# Altium PCB PCB_Layout.PcbDoc
Units mm, origin at the board's own origin, x right, y up, seen from the top; angles counter-clockwise.
Board outline 100 x 50 mm, 4 copper layers (L1 (SIGNAL), L2 (GND), L3 (GND), L4 (SIGNAL)), stack 1.586 mm thick; 22 components, 14 nets, 117 pads, 43 vias.
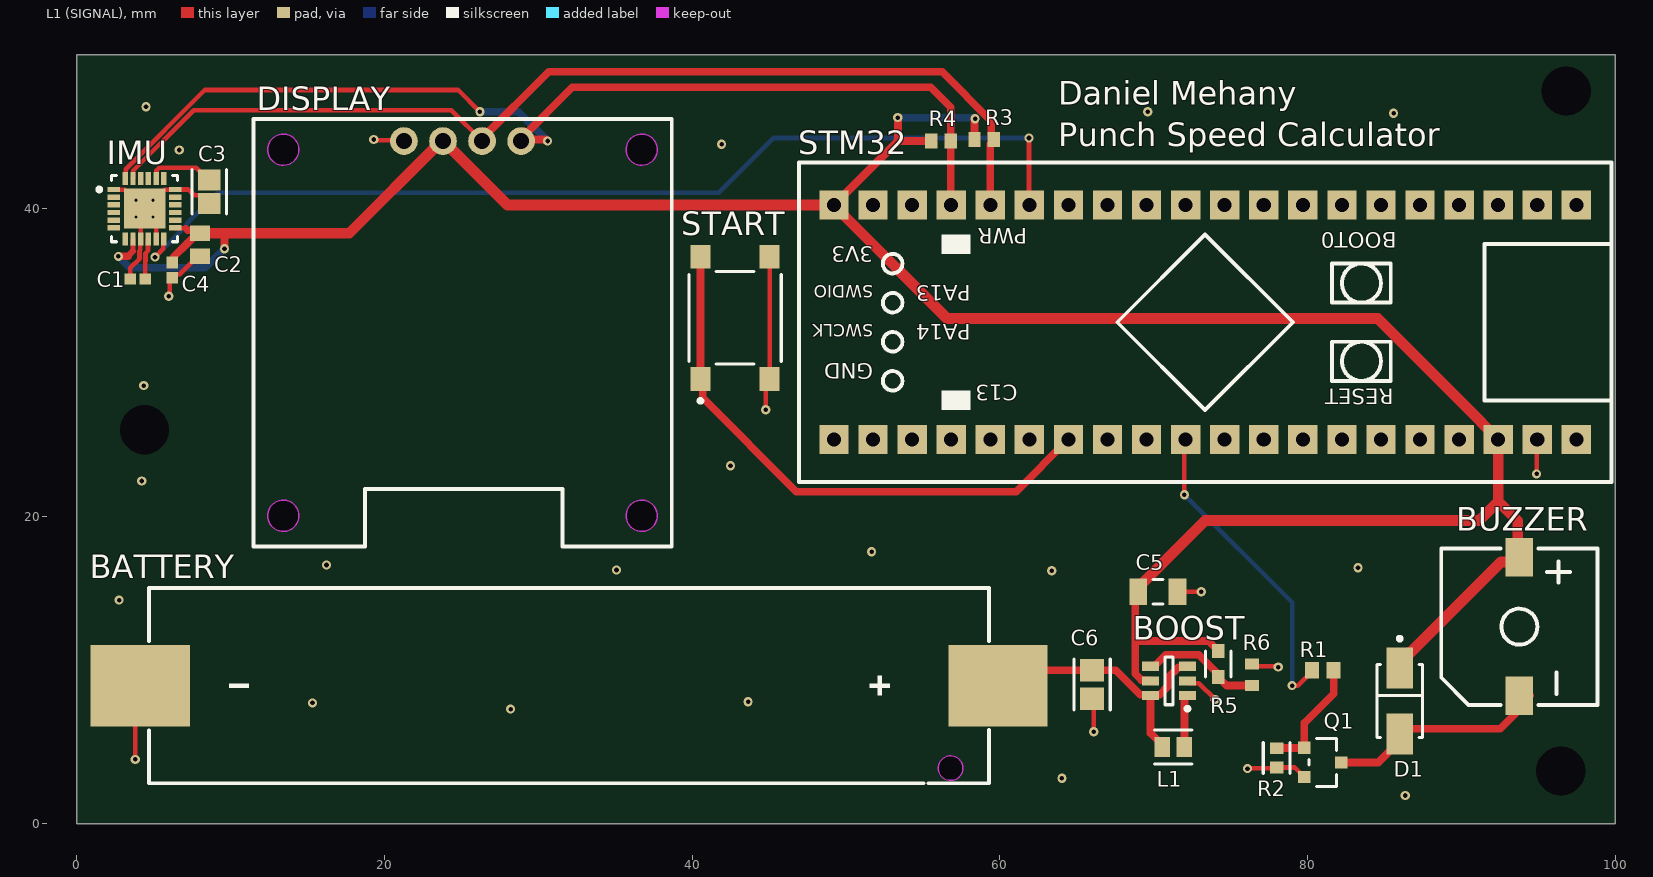
[diagram p0: L1 (SIGNAL) view]
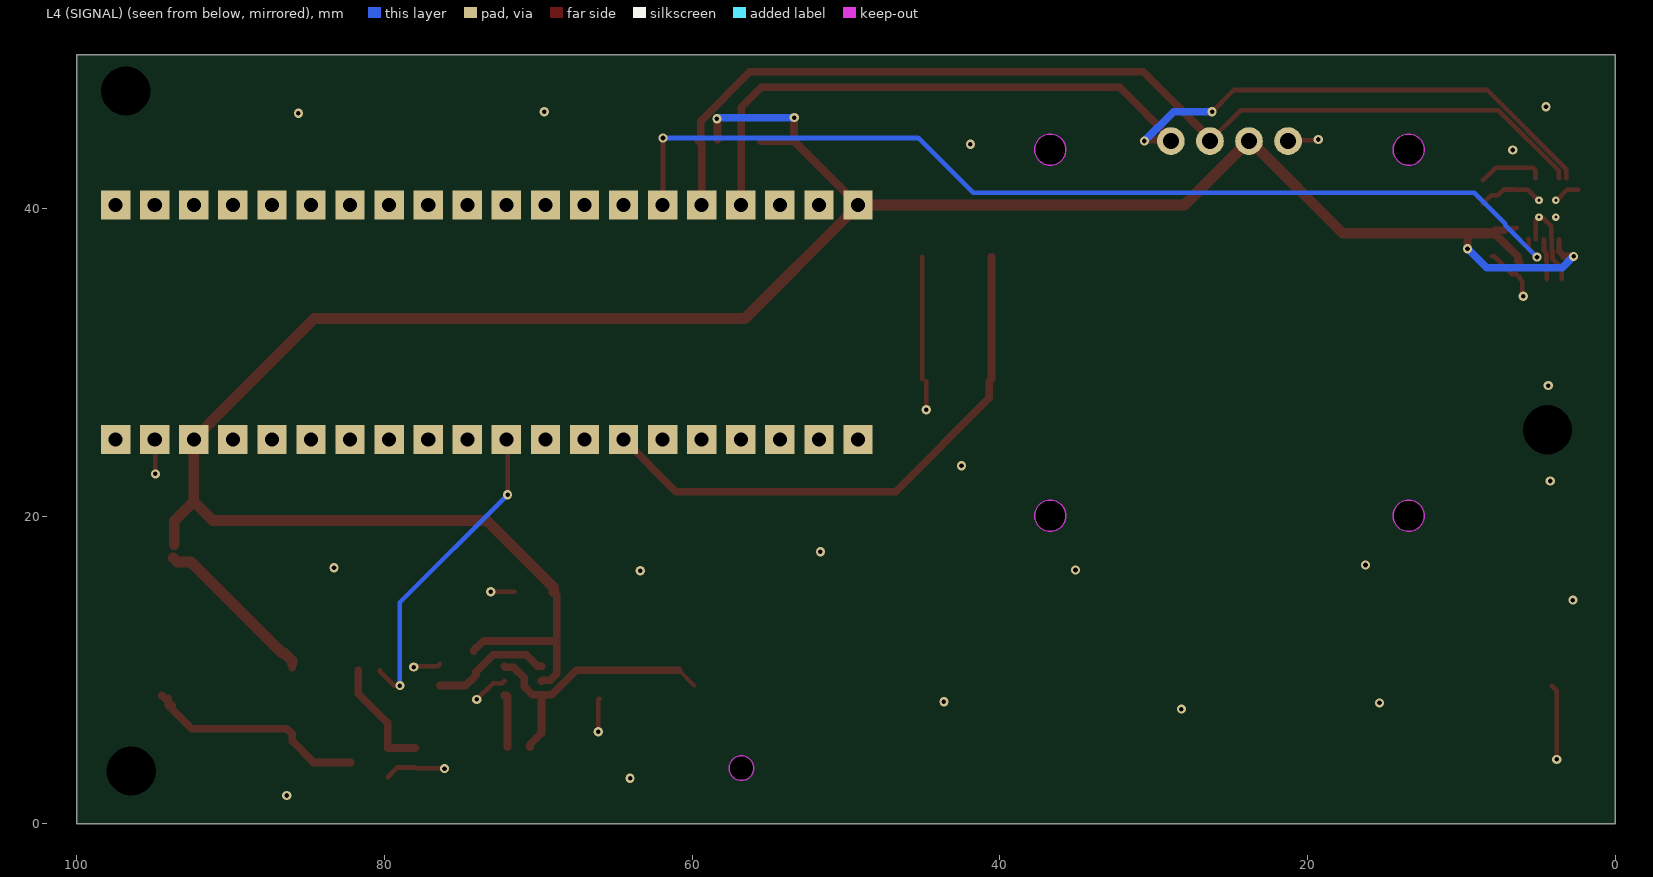
[diagram p1: L4 (SIGNAL) view, seen from below]
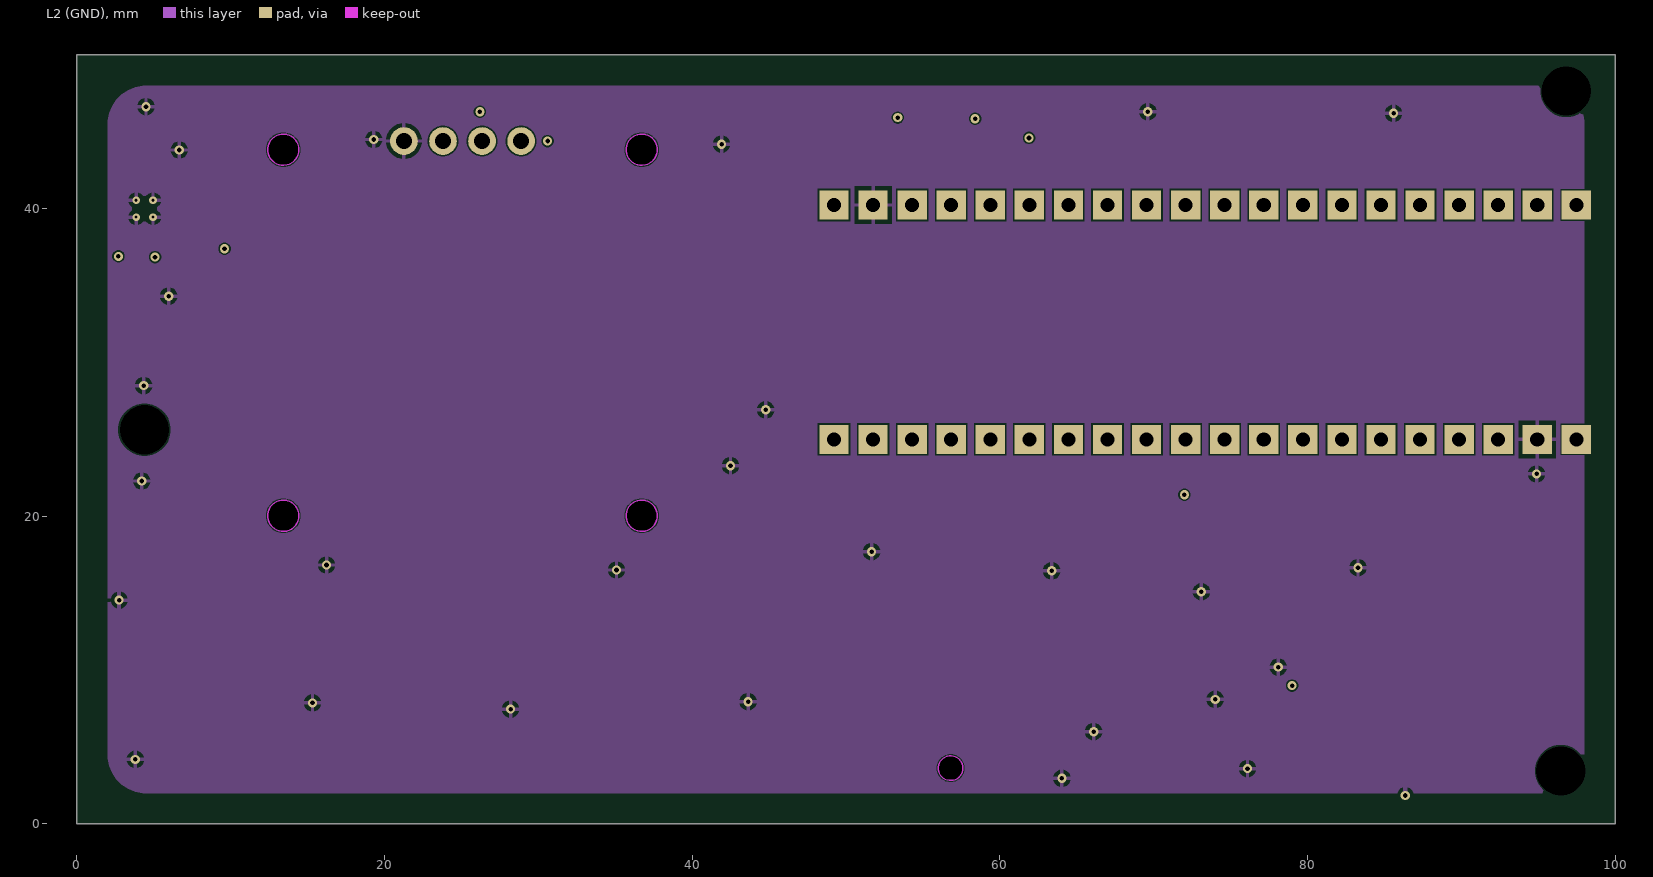
[diagram p2: L2 (GND)]
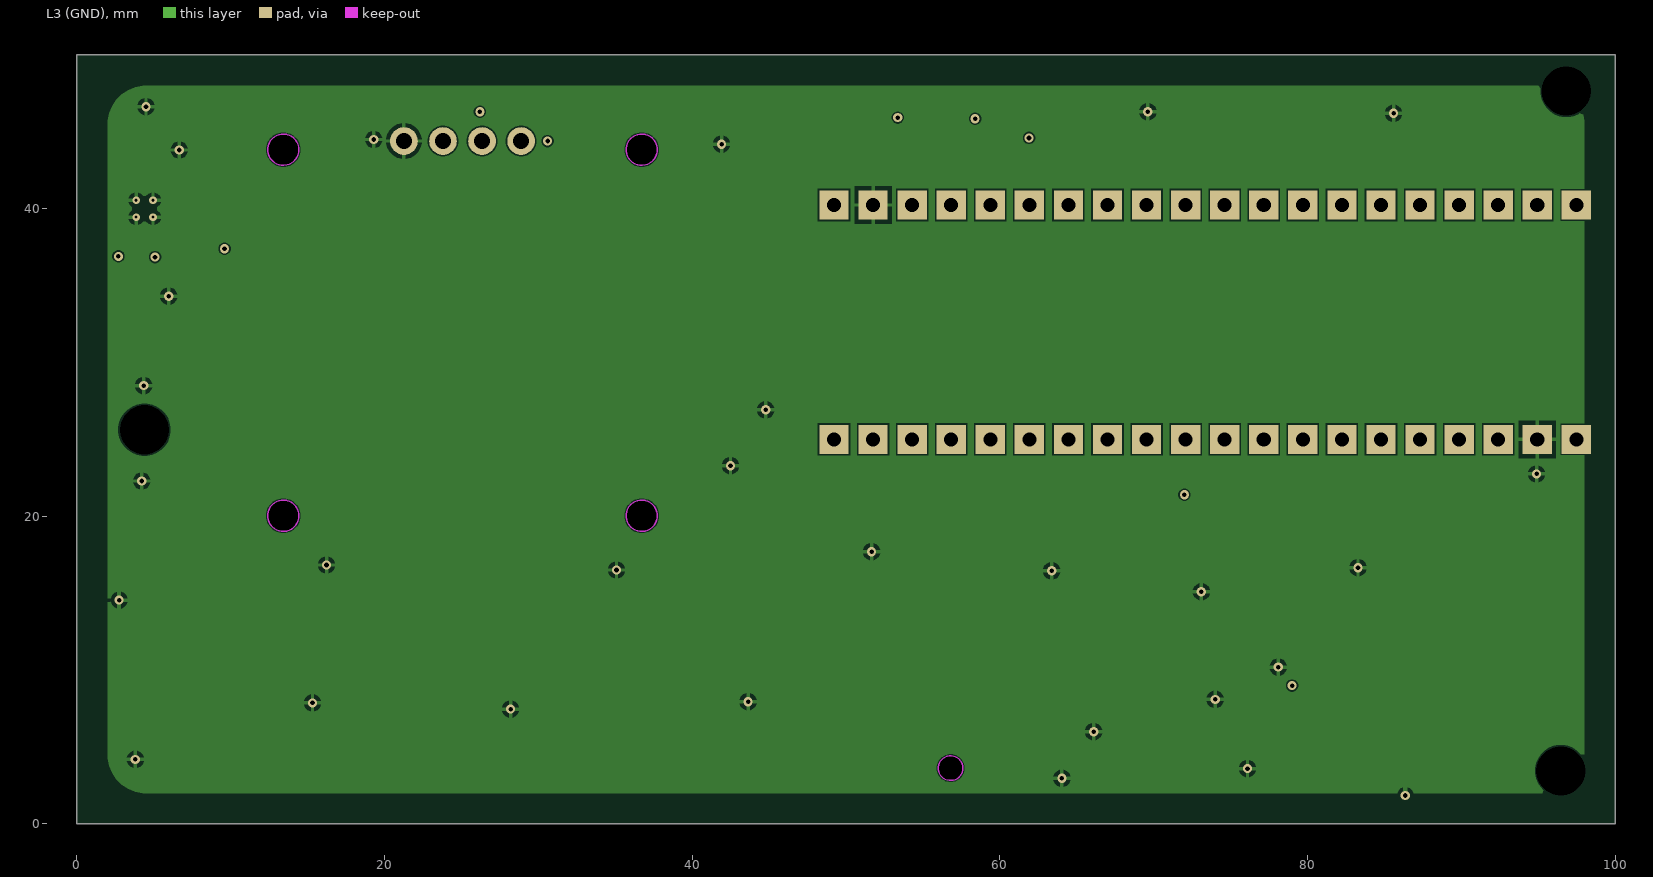
[diagram p3: L3 (GND)]
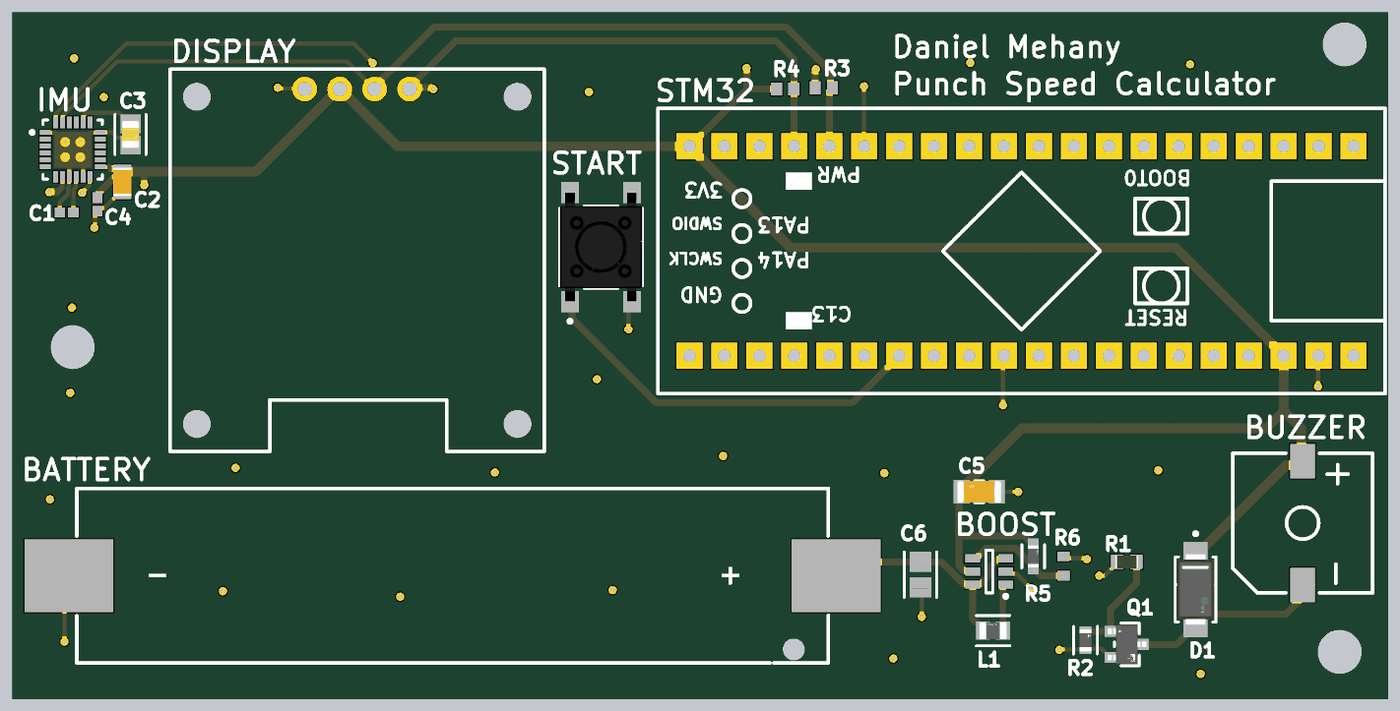
[diagram p4: 3D render of the assembled board from above, using the file's embedded part models]

## Layer stack, top to bottom
Top Solder: solder mask 0.0102, Solder Resist, Dk 3.5
L1 (SIGNAL): signal copper 0.035
Dielectric 1: prepreg 0.2104, PP-006, Dk 4.1
L2 (GND): signal copper 0.0152
Dielectric 2: dielectric 1.065, FR-4, Dk 4.8
L3 (GND): signal copper 0.0152
Dielectric 3: prepreg 0.2104, PP-006, Dk 4.1
L4 (SIGNAL): signal copper 0.035
Bottom Solder: solder mask 0.0102, Solder Resist, Dk 3.5

## Board outline
0,0 100,0 100,50 0,50

## Design rules (kind name [scope] priority, off if disabled: settings)
Clearance [All] p1: gap=0.09 ignorepadtopadclearanceinfootprint=FALSE
HoleSize [All] p1: absolutevalues=TRUE maxlimit=6 minlimit=0.3 maxpercent=80.000 minpercent=20.000
HoleToHoleClearance [All] p1: gap=0.2 allowstackedmicrovias=TRUE
MinimumSolderMaskSliver [All] p1: minsoldermaskwidth=0.1
PolygonConnect [All] p1: connectstyle=Relief reliefconductorwidth=0.254 reliefentries=4 polygonreliefangle="90 Angle" airgapwidth=0.254
RoutingVias [All] p1: holewidth=0.3 width=0.6 viastyle="Through Hole" minholewidth=0.3 minwidth=0.5 maxholewidth=1 maxwidth=3
SilkToSilkClearance [All] p1: silktosilkclearance=0.2
SilkToSolderMaskClearance [IsPad] p1: minsilkscreentomaskgap=0.1 clearancetoexposedcopper=TRUE
SolderMaskExpansion [All] p1: expansion=0.102 istentingtop=FALSE
SupplyNets "Schematic Supply Nets_1" [InNet('+3.3V')] p1: voltage=0.000
SupplyNets "Schematic Supply Nets" [InNet('GND')] p2: voltage=0.000
Width [All] p1: maxlimit=1 minlimit=0.2 preferedwidth=0.3
25 further rules are at their usual default settings.

## Components (designator, comment, footprint, x,y, rotation, side; value= is the part's Value field where it differs from the comment)
BATTERY "BH-AAA-B5BA021" BAT-SMD_BH-AAA-B5BA021 32,9 r180 top (schematic designator BP1)
BOOST "MCP1640T-I/CHY" MCHP-SOT-23-CHY6_N 71,9.3 r180 top
BUZZER "2.7kHz" BUZ-SMD_L9.6-W9.6-LS10.0-R 93.777,12.827 r90 top
C1 "CL05B104KO5NNNC" CAPC1050X55X23ML05T13 3.955,35.433 r0 top
C2 "10nF" CAPC2013X75X45LL10T25 8,37.65 r90 top
C3 "2.2nF" FP-C2012-060-0_2-IPC_B 8.6,41.1 r270 top
C4 "CL05B104KO5NNNC" CAPC1050X55X23ML05T13 6.2,36.01 r90 top
C5 "CL31A106KBHNNNE" FP-CL31-IPC_C 70.276,15.1 r0 top value=10uF
C6 "4.7uF" FP-CL21-IPC_A 66,9.074 r270 top
D1 "SS14" FP-403AE-MFG 86,8 r90 top
DISPLAY "HS96L03W2C03" OLED-TH_L27.8-W27.2-P2.54_C9900033791 25.07,44.4 r0 top (schematic designator DISP)
IMU "MPU-6050" IS-QFN-24_V 4.4,40 r0 top
L1 "4.7uH" FP-LQM21PH_G0-IPC_C 71.274,5 r180 top
Q1 "AO3400A" FP-SOT23-MFG 81,4 r0 top
R1 "100R" RESC1609X50X30ML8T20 81,10 r0 top
R2 "0603WAF1003T5E" FP-CRCW0603-HPe3-IPC_C 78,4.3 r90 top value=100kR
R3 "2.2kR" RESC1609X50X30NL10T20 58.975,44.5 r0 top
R4 "2.2kR" RESC1609X50X30NL10T20 56.175,44.4 r0 top
R5 "976kR" FP-AC0603-MFG 74.2,10.4 r90 top
R6 "562kR" RESC1608X55X25NL10T15 76.4,9.7 r270 top
START "START" FP-PTS645SM43SMTR92LFS-MFG 42.788,32.906 r90 top
STM32 "BLACK PILL V3 STM32F411" "BLACK PILL V3" 73.35,33.446 r270 top

## Footprints (in the part's own frame and the unit in brackets; to place one, negate y for a bottom-side part, rotate by r counter-clockwise, add the part's x,y. Pads: shape width x height; smd on the part's side, far side on the other; paste and mask are expansions set on the pad)
BAT-SMD_BH-AAA-B5BA021 [mm]
  rect 6.45x5.3 smd: 1(-27.875,0) 2(27.875,0)
  Keep-Out Layer board cut-out: -24,5.37 -24,5.265 -24.054,5.061 -24.16,4.879 -24.309,4.73 -24.491,4.625 -24.695,4.57 -24.905,4.57 -25.109,4.625 -25.291,4.73 -25.44,4.879 -25.545,5.061 -25.6,5.265 -25.6,5.37 -25.6,5.475 -25.545,5.679 -25.44,5.861 -25.291,6.01 -25.109,6.116 -24.905,6.17 -24.695,6.17 -24.491,6.116 -24.309,6.01 -24.16,5.861 -24.054,5.679 -24,5.475 -24,5.37 -24,5.37
  Keep-Out Layer circle w0.025: c-24.8,5.37 r0.8
  Keep-Out Layer region: -24,5.37 -24,5.265 -24.054,5.061 -24.16,4.879 -24.309,4.73 -24.491,4.625 -24.695,4.57 -24.905,4.57 -25.109,4.625 -25.291,4.73 -25.44,4.879 -25.545,5.061 -25.6,5.265 -25.6,5.37 -25.6,5.475 -25.545,5.679 -25.44,5.861 -25.291,6.01 -25.109,6.116 -24.905,6.17 -24.695,6.17 -24.491,6.116 -24.309,6.01 -24.16,5.861 -24.054,5.679 -24,5.475 -24,5.37 -24,5.37
  silkscreen extent -27.31,-6.35 27.3,6.35
"BLACK PILL V3" [mil]
  rect 75x75 hole 36 paste-99999 mask+4: 1(-267.5,950) 2(-267.5,850) 3(-267.5,750) 4(-267.5,650) 5(-267.5,550) 6(-267.5,450) 7(-267.5,350) 8(-267.5,250) 9(-267.5,150) 10(-267.5,50) 11(-267.5,-50) 12(-267.5,-150) 13(-267.5,-250) 14(-267.5,-350) 15(-267.5,-450) 16(-267.5,-550) 17(-267.5,-650) 18(-267.5,-750) 19(-267.5,-850) 20(-267.5,-950) 21(332.5,950) 22(332.5,850) 23(332.5,750) 24(332.5,650) 25(332.5,550) 26(332.5,450) 27(332.5,350) 28(332.5,250) 29(332.5,150) 30(332.5,50) 31(332.5,-50) 32(332.5,-150) 33(332.5,-250) 34(332.5,-350) 35(332.5,-450) 36(332.5,-550) 37(332.5,-650) 38(332.5,-750) 39(332.5,-850) 40(332.5,-950)
  silkscreen extent -377,-1040 442,1040
BUZ-SMD_L9.6-W9.6-LS10.0-R [mm]
  rect 2.5x1.8 smd: 1(4.5,0) 2(-4.5,0)
  silkscreen extent -5.08,-5.08 5.08,5.08
CAPC1050X55X23ML05T13 [mm] "Chip Capacitor, 2-Leads, Body 1.05x0.55mm, IPC Low Density"
  rect 0.76x0.72 smd: 1(-0.49,0) 2(0.49,0)
  body extent -0.53,-0.28 0.53,0.27, height 0.55
CAPC2013X75X45LL10T25 [mm] "Chip Capacitor, 2-Leads, Body 2.1x1.35mm, IPC High Density"
  rect 1x1.3 smd: 1(-0.75,0) 2(0.75,0)
  body extent -1.05,-0.67 1.05,0.67, height 0.75
FP-403AE-MFG [mm]
  rect 2.65x1.75 smd paste+0 mask+0: 1(-2.15,0) 2(2.15,0)
  silkscreen extent -2.37,-1.48 4.17,1.48, body extent -3.57,-1.58 3.57,1.58, height 0.25
FP-AC0603-MFG [mm]
  rect 0.9x0.8 smd paste+0 mask+0: 1(-0.85,0) 2(0.85,0)
  silkscreen extent -0.85,-0.82 0.85,0.82, body extent -1.4,-0.55 1.4,0.55, height 0.25
FP-C2012-060-0_2-IPC_B [mm]
  rect 1.378x1.456 smd paste+0 mask+0: 1(-0.764,0) 2(0.764,0)
  silkscreen extent -1.45,-1.13 1.45,1.13, body extent -1.7,-0.98 1.7,0.98, height 0.25
FP-CL21-IPC_A [mm]
  rect 1.455x1.556 smd paste+0 mask+0: 1(-0.926,0) 2(0.926,0)
  silkscreen extent -1.65,-1.18 1.65,1.18, body extent -2.15,-1.28 2.15,1.28, height 0.25
FP-CL31-IPC_C [mm]
  rect 1.154x1.706 smd paste+0 mask+0: 1(-1.276,0) 2(1.276,0)
  silkscreen extent -0.32,-0.8 0.32,0.8, body extent -1.95,-1 1.95,1, height 0.25
FP-CRCW0603-HPe3-IPC_C [mm]
  rect 0.758x0.862 smd paste+0 mask+0: 1(-0.627,0) 2(0.627,0)
  silkscreen extent -1.01,-0.87 1.01,0.87, body extent -1.11,-0.58 1.11,0.58, height 0.25
FP-LQM21PH_G0-IPC_C [mm]
  rect 1.006x1.308 smd paste+0 mask+0: 1(-0.726,0) 2(0.726,0)
  silkscreen extent -1.23,-1.1 1.23,1.1, body extent -1.33,-0.8 1.33,0.8, height 0.25
FP-PTS645SM43SMTR92LFS-MFG [mm]
  rect 1.55x1.3 smd paste+0 mask+0: 1(-3.975,2.25) 2(3.975,2.25) 3(-3.975,-2.25) 4(3.975,-2.25)
  silkscreen extent -5.52,-3 3,3, body extent -4.85,-3.1 4.85,3.1, height 0.25
FP-SOT23-MFG [mm]
  rect 0.8x0.8 smd paste+0 mask+0: 1(-1.2,0.95) 2(-1.2,-0.95) 3(1.2,0)
  silkscreen extent -0.9,-1.55 0.9,1.55, body extent -1.7,-1.78 1.7,1.78, height 0.25
IS-QFN-24_V [mm] "QFN, 24-Leads, Body 4x4mm, Pitch 0.5mm, Thermal Pad 2.7x2.6mm"
  rect 0.8x0.35 smd: 1(-2,1.25) 2(-2,0.75) 3(-2,0.25) 4(-2,-0.25) 5(-2,-0.75) 6(-2,-1.25) 13(2,-1.25) 14(2,-0.75) 15(2,-0.25) 16(2,0.25) 17(2,0.75) 18(2,1.25)
  rect 0.35x0.85 smd mask+0.102: 7(-1.25,-1.975) 8(-0.75,-1.975) 9(-0.25,-1.975) 10(0.25,-1.975) 11(0.75,-1.975) 12(1.25,-1.975) 19(1.25,1.975) 20(0.75,1.975) 21(0.25,1.975) 22(-0.25,1.975) 23(-0.75,1.975) 24(-1.25,1.975)
  rect 2.7x2.6 smd paste-2539.97 mask+0.1: 25(0,0)
  silkscreen extent -3.07,-2.15 2.15,2.15, body extent -2,-2 2,2, height 0.95
MCHP-SOT-23-CHY6_N [mm] "SOT23, 6-Leads, Body 2.9x1.55mm, Pitch 0.95mm, IPC Medium Density"
  rect 1.1x0.6 smd: 1(-1.2,0.95) 2(-1.2,0) 3(-1.2,-0.95) 4(1.2,-0.95) 5(1.2,0) 6(1.2,0.95)
  silkscreen extent -1.33,-1.55 0.25,1.92, body extent -0.9,-1.55 0.9,1.55, height 1.45
OLED-TH_L27.8-W27.2-P2.54_C9900033791 [mm]
  round 1.8 hole 1.05 paste-2539.97 mask+0.05: 1(-3.81,0) 2(-1.27,0) 3(1.27,0) 4(3.81,0)
  Keep-Out Layer board cut-out: 12.666,-24.36 12.666,-24.494 12.597,-24.752 12.463,-24.984 12.274,-25.173 12.042,-25.307 11.784,-25.376 11.516,-25.376 11.258,-25.307 11.026,-25.173 10.837,-24.984 10.703,-24.752 10.634,-24.494 10.634,-24.36 10.634,-24.226 10.703,-23.968 10.837,-23.736 11.026,-23.547 11.258,-23.413 11.516,-23.344 11.784,-23.344 12.042,-23.413 12.274,-23.547 12.463,-23.736 12.597,-23.968 12.666,-24.226 12.666,-24.36 12.666,-24.36
  Keep-Out Layer board cut-out: -10.634,-24.36 -10.634,-24.494 -10.703,-24.752 -10.837,-24.984 -11.026,-25.173 -11.258,-25.307 -11.516,-25.376 -11.784,-25.376 -12.042,-25.307 -12.274,-25.173 -12.463,-24.984 -12.597,-24.752 -12.666,-24.494 -12.666,-24.36 -12.666,-24.226 -12.597,-23.968 -12.463,-23.736 -12.274,-23.547 -12.042,-23.413 -11.784,-23.344 -11.516,-23.344 -11.258,-23.413 -11.026,-23.547 -10.837,-23.736 -10.703,-23.968 -10.634,-24.226 -10.634,-24.36 -10.634,-24.36
  Keep-Out Layer board cut-out: 12.666,-0.56 12.666,-0.694 12.597,-0.952 12.463,-1.184 12.274,-1.373 12.042,-1.507 11.784,-1.576 11.516,-1.576 11.258,-1.507 11.026,-1.373 10.837,-1.184 10.703,-0.952 10.634,-0.694 10.634,-0.56 10.634,-0.426 10.703,-0.168 10.837,0.064 11.026,0.253 11.258,0.387 11.516,0.456 11.784,0.456 12.042,0.387 12.274,0.253 12.463,0.064 12.597,-0.168 12.666,-0.426 12.666,-0.56 12.666,-0.56
  Keep-Out Layer board cut-out: -10.634,-0.56 -10.634,-0.694 -10.703,-0.952 -10.837,-1.184 -11.026,-1.373 -11.258,-1.507 -11.516,-1.576 -11.784,-1.576 -12.042,-1.507 -12.274,-1.373 -12.463,-1.184 -12.597,-0.952 -12.666,-0.694 -12.666,-0.56 -12.666,-0.426 -12.597,-0.168 -12.463,0.064 -12.274,0.253 -12.042,0.387 -11.784,0.456 -11.516,0.456 -11.258,0.387 -11.026,0.253 -10.837,0.064 -10.703,-0.168 -10.634,-0.426 -10.634,-0.56 -10.634,-0.56
  Keep-Out Layer circle w0.025: c11.65,-24.36 r1.016
  Keep-Out Layer circle w0.025: c-11.65,-24.36 r1.016
  Keep-Out Layer circle w0.025: c11.65,-0.56 r1.016
  Keep-Out Layer circle w0.025: c-11.65,-0.56 r1.016
  Keep-Out Layer region: 12.666,-24.36 12.666,-24.494 12.597,-24.752 12.463,-24.984 12.274,-25.173 12.042,-25.307 11.784,-25.376 11.516,-25.376 11.258,-25.307 11.026,-25.173 10.837,-24.984 10.703,-24.752 10.634,-24.494 10.634,-24.36 10.634,-24.226 10.703,-23.968 10.837,-23.736 11.026,-23.547 11.258,-23.413 11.516,-23.344 11.784,-23.344 12.042,-23.413 12.274,-23.547 12.463,-23.736 12.597,-23.968 12.666,-24.226 12.666,-24.36 12.666,-24.36
  Keep-Out Layer region: -10.634,-24.36 -10.634,-24.494 -10.703,-24.752 -10.837,-24.984 -11.026,-25.173 -11.258,-25.307 -11.516,-25.376 -11.784,-25.376 -12.042,-25.307 -12.274,-25.173 -12.463,-24.984 -12.597,-24.752 -12.666,-24.494 -12.666,-24.36 -12.666,-24.226 -12.597,-23.968 -12.463,-23.736 -12.274,-23.547 -12.042,-23.413 -11.784,-23.344 -11.516,-23.344 -11.258,-23.413 -11.026,-23.547 -10.837,-23.736 -10.703,-23.968 -10.634,-24.226 -10.634,-24.36 -10.634,-24.36
  Keep-Out Layer region: 12.666,-0.56 12.666,-0.694 12.597,-0.952 12.463,-1.184 12.274,-1.373 12.042,-1.507 11.784,-1.576 11.516,-1.576 11.258,-1.507 11.026,-1.373 10.837,-1.184 10.703,-0.952 10.634,-0.694 10.634,-0.56 10.634,-0.426 10.703,-0.168 10.837,0.064 11.026,0.253 11.258,0.387 11.516,0.456 11.784,0.456 12.042,0.387 12.274,0.253 12.463,0.064 12.597,-0.168 12.666,-0.426 12.666,-0.56 12.666,-0.56
  Keep-Out Layer region: -10.634,-0.56 -10.634,-0.694 -10.703,-0.952 -10.837,-1.184 -11.026,-1.373 -11.258,-1.507 -11.516,-1.576 -11.784,-1.576 -12.042,-1.507 -12.274,-1.373 -12.463,-1.184 -12.597,-0.952 -12.666,-0.694 -12.666,-0.56 -12.666,-0.426 -12.597,-0.168 -12.463,0.064 -12.274,0.253 -12.042,0.387 -11.784,0.456 -11.516,0.456 -11.258,0.387 -11.026,0.253 -10.837,0.064 -10.703,-0.168 -10.634,-0.426 -10.634,-0.56 -10.634,-0.56
  silkscreen extent -13.6,-26.36 13.6,1.44
RESC1608X55X25NL10T15 [mm] "Chip Resistor, 2-Leads, Body 1.70x0.90mm, IPC Medium Density"
  rect 0.7x0.9 smd: 1(-0.7,0) 2(0.7,0)
  body extent -0.85,-0.45 0.85,0.45, height 0.55
RESC1609X50X30ML8T20 [mm] "Chip Resistor, 2-Leads, Body 1.65x0.95mm, IPC Low Density"
  rect 0.9x1.05 smd: 1(-0.7,0) 2(0.7,0)
  body extent -0.82,-0.48 0.82,0.48, height 0.5
RESC1609X50X30NL10T20 [mm] "Chip Resistor, 2-Leads, Body 1.55x0.85mm, IPC Medium Density"
  rect 0.8x0.95 smd: 1(-0.625,0) 2(0.625,0)
  body extent -0.82,-0.48 0.82,0.48, height 0.5

## Part data
BATTERY: JLCPCB Part #=C7525446, JLCPCB Part Class="Extended Part", LCSC Part Name="电池盒 适用电池:7号", Manufacturer=MYOUNG(美阳), Operating Temperature=-25℃~+85℃, Add into BOM=yes, Battery Type=AAA, Connector Type="Battery Holder", Contact Material="Phosphor Bronze", Contact Plating=Gold, Convert to PCB=yes, Datasheet=https://item.szlcsc.com/datasheet/BH-AAA-B5BA021/8619513.html, Device=BH-AAA-B5BA021, Manufacturer Part=BH-AAA-B5BA021, Supplier=LCSC, Supplier Footprint=SMD, Supplier Part=C7525446, Symbol=BH-AAA-B5BA021
BOOST: library part CMP-0139-00282-1, "Start-up Synchronous Boost Regulator with True Output Disconnect or Input / Output Bypass Option, 350 mA, Input Voltage 0.65 to 5.5 V, Output Voltage 2.0 to 5.5 V, -40 to 85 degC, 6-pin SOT-23 (CHY6), Tape and Reel", JLCPCB Part #=C44365, Manufacturer=Microchip, ComponentLink1Description="Manufacturer URL", ComponentLink1URL=http://www.microchip.com, ComponentLink2Description=Datasheet, ComponentLink2URL=http://ww1.microchip.com/downloads/en/DeviceDoc/22234B.pdf, ComponentLink3Description="Package Specification", ComponentLink3URL=http://www.microchip.com/stellent/groups/techpub_sg/documents/packagingspec/en012702.pdf, ComponentLink4Description="Product URL", ComponentLink4URL=http://www.microchip.com/MCP1640, DatasheetVersion="Rev. B", Mounting Technology="Surface Mount", PackageDescription="6-Lead Plastic Small Outline Transistor, 2.9 x 1.55 mm Body, 0.95 mm Pitch", PackageReference=SOT-23-CHY6, PackageVersion=C04-028B, PartNumber=MCP1640T-I/CHY
BUZZER: library part MLT-9650, JLCPCB Part #=C96127, JLCPCB Part Class="Extended Part", LCSC Part Name=耐环保MLT-9650, Manufacturer=华能, Voltage - Supply=3V~7V, Add into BOM=yes, Convert to PCB=yes, Datasheet=https://atta.szlcsc.com/upload/public/pdf/source/20170914/C96127_1505374148680969227.pdf, Device=MLT-9650, Driver Circuitry="Active Buzzer (Built-in Driving Circuit)", Height=5.5mm, Length=9.6mm, Manufacturer Part=MLT-9650, Sound Pressure Level(SPL)=85dB, Supplier=LCSC, Supplier Footprint=-, Supplier Part=C96127, Symbol=HND-9650B, Technology=Electromagnetic, Width=9.6mm
C1 C4: library part CMP-2000-05439-1, "Chip Capacitor, 100 nF, +/- 10%, 16 V, -55 to 125 degC, 0402 (1005 Metric), RoHS, Tape and Reel", Capacitance=100000pF, Case Size/Dimension=0402, Dielectric=X7R, JLCPCB Part #=C1525, Manufacturer="Samsung Electro-Mechanics", Rated Voltage=16V, Tolerance (%)=±10%, cap=0.1uF, Datasheet URL=https://datasheet.ciiva.com/29198/458718-da-01-en-vs-kondensator-0402-29198423.pdf, Datasheet Version=Nov-10, Manufacturer URL=http://www.samsungsem.com/global/index.jsp
C2: library part CMP-2000-06105-1, "Multilayer Ceramic Capacitor, 10 nF, 50 V, -55 to 125 degC, 2-Pin SMD, RoHS, Tape and Reel / CL21B103KBANNNC", Capacitance=10000pF, Case Size/Dimension=0805, Dielectric=X7R, JLCPCB Part #=C1710, Manufacturer="Samsung Electro-Mechanics", Package Description="2-Pin Surface Mount Device, Body 2 x 1.25 mm", Rated Voltage=50V, Tolerance (%)=±10%, Datasheet URL=https://datasheet.ciiva.com/29199/455082-da-01-en-vs-kondensator-0805-29199459.pdf, Datasheet Version=11/2010, Manufacturer URL=http://www.samsungsem.com/global/index.jsp, Mounting Technology=SurfaceMount, Package Reference=0805
C3: library part CMP-08246-003906-1, "Multilayer Ceramic Capacitors 2.2nF ±5% 50V C0G SMD 0805", Case Code (Imperial)=0805, Case Code (Metric)=2012, Dielectric=C0G, Dielectric Material=Ceramic, JLCPCB Part #=C28260, Max Operating Temperature=125°C, Min Operating Temperature=-55°C, Package Quantity=1, Temperature Coefficient=30ppm/°C, Tolerance=5%, Voltage=50V, Case/Package=0805, Construction=Flat, Depth=1.25mm, Height=0.6mm, Lead Free="Lead Free", Length=2mm, Mount="Surface Mount", Packaging="Tape and Reel", RoHS Compliant=Yes, Series=C, Termination=SMD/SMT, Thickness=0.028inch, Voltage Rating=50V, Voltage Rating (DC)=50V, Weight=0.000194oz, Width=0.049inch
C5: library part CMP-13271-000016-1, "CAP CER 10UF 50V X5R 1206", Capacitance=10uF, JLCPCB Part #=C13585, Manufacturer=Samsung, Package=CL31, Temperature="-55°C to +85°C", Temperature Characteristic=X5R, Temperature Coefficient=15%, Temperature Range High=+85°C, Temperature Range Low=-55°C, Tolerance=10%, Voltage=50V, Automotive=No, Category=Cap, ComponentLink2Description=Datasheet, ComponentLink2URL=http://www.samsungsem.com/kr/support/product-search/mlcc/__icsFiles/afieldfile/2018/06/21/CL31A106KBHNNNE.pdf, Device Class L1="Passive Components", Device Class L2=Capacitors, Device Class L3="Ceramic Capacitors", Digikey Description="CAP CER 10UF 50V X5R 1206", Height=1.8mm, Ipc Land Pattern Name=CAPC320160X160, Lead Free=Yes, Manufacturer Part Number=CL31A106KBHNNNE, Material=Ceramic, Octopart=https://octopart.com/cl31a106kbhnnne-samsung-19832778, RoHS=TRUE, Voltage Rating=50V
C6: library part CMP-13271-002624-1, "CL21 Series 0805 4.7uF 25V ±10% Tolerance X5R Multilayer Ceramic Chip Capacitor", Case Code (Imperial)=0805, Case Code (Metric)=2012, Dielectric=X5R, JLCPCB Part #=C1779, Max Operating Temperature=85°C, Min Operating Temperature=-55°C, Package Quantity=1, Tolerance=10%, Voltage Rating=25V, Capacitance=4.7uF, Case/Package=0805, Depth=1.25mm, Height=1.25mm, Lead Free="Lead Free", Length=2mm, Mount="Surface Mount", Packaging="Tape and Reel", Radiation Hardening=No, Thickness=0.055inch, Voltage Rating (DC)=25V, Width=0.049inch
D1: library part CMP-2000-04943-2, "DIODE SCHOTTKY 40V 1A SMA", Forward Current=1A, JLCPCB Part #=C2480, Manufacturer="ON Semiconductor", Max Junction Temp=+125°C, Max Repetitive Reverse Voltage=40V, Max Surge Forward Current=40A, Package=403AE, Peak Reverse Current=0.2mA, Temperature="-65°C to +125°C", Temperature Range Low=-65°C, Automotive=No, Category=Diode, ComponentLink2Description=Datasheet, ComponentLink2URL=https://www.onsemi.com/pub/Collateral/SS19-D.PDF, Device Class L1="Discrete Semiconductors", Device Class L2=Diodes, Device Class L3="Schottky Diodes", Digikey Description="DIODE SCHOTTKY 40V 1A SMA", Height=2.5mm, Lead Free=Yes, Manufacturer Part Number=SS14, Mouser Description="Schottky Diodes & Rectifiers SMA 40V 1.0A", Octopart=https://octopart.com/ss14-on+semiconductor-29205033, RoHS=TRUE, Standoff Height=0.05mm, Temperature Range High=+125°C
DISPLAY: JLCPCB Part #=C5248080, JLCPCB Part Class="Extended Part", LCSC Part Name=0.96寸OLED显示屏窄白光IIC, Manufacturer=HS(汉昇), Operating Temperature=-40℃~+70℃, Add into BOM=yes, Convert to PCB=yes, Datasheet=https://atta.szlcsc.com/upload/public/pdf/source/20230627/763D01F79A90007632F098068C7C8AD9.pdf, Device=HS96L03W2C03, Interface Type=I2C, Main Control Chip=SSD1315, Manufacturer Part=HS96L03W2C03, Pixel Resolution=128x64, Size=0.96, Supplier=LCSC, Supplier Footprint=-, Supplier Part=C5248080, Symbol=HS96L03W2C03
IMU: library part CMP-1753-00002-2, "3-Axis Gyroscope, Accelerometer and a Digital Motion Processor(TM) (DMP), 2.375 to 3.46 V, -40 to 85 degC, 24-Pin QFN, RoHS, Tape and Reel", JLCPCB Part #=C24112, Manufacturer=InvenSense, Standard Package=5,000, Category=Sensors,Transducers, Datasheet URL=http://datasheet.octopart.com/MPU-6050-InvenSense-datasheet-14421344.pdf, Datasheet Version="Rev. 3.3, 05/2012", Dynamic Catalog=MPU-6000™Series, Family=Multifunction, Featured Product=MPU-60506-Axis,IntegratedI²CSolution, Manufacturer URL=http://www.invensense.com/, Online Catalog=MPU-6000™Series, Other Names="1428-1007-2 / MPU6050", Output Type=Digital, Sensor Type=MotionTracking, Unit PriceUSD=Digital
L1: library part CMP-06042-017025-1, "Multilayer Type Inductor for Power Lines, 0805 (2012), 4.7μH, 20%, 0.288Ω, 0.8A", Case Code (Imperial)=0805, Case Code (Metric)=2012, Current Rating=800mA, DC Resistance (DCR)=288mR, JLCPCB Part #=C86090, Max Operating Temperature=125°C, Min Operating Temperature=-55°C, Package Quantity=4000, Self Resonant Frequency=30MHz, Test Frequency=1MHz, Tolerance=20%, Case/Package=0805, Core Material=Ferrite, Height - Seated (Max)=0.039inch, Length=0.079inch, Mount="Surface Mount", Packaging="Cut Tape", RoHS Compliant=Yes, Shielding=Shielded, Width=0.049inch
Q1: library part CMP-83955-000006-1, "MOSFET N-CH 30V 5.7A SOT23", Case/Package=SOT-23, Continuous Drain Current (ID)=5.7A, Drain to Source Voltage (Vdss)=30V, Gate to Source Voltage (Vgs)=12V, Input Capacitance=630pF, JLCPCB Part #=C20917, Max Operating Temperature=150°C, Max Power Dissipation=1.4W, Min Operating Temperature=-55°C, Lead Free="Lead Free", Mount="Surface Mount", Number of Elements=1, Number of Pins=3, Packaging="Tape and Reel", Power Dissipation=1.4W, Radiation Hardening=No, Rds On Max=26.5mR
R1: library part CMP-2000-03824-5, "Chip Resistor, 100 Ohm, +/- 1%, 100 mW,-55 to 155 degC, 0603 (1608 Metric), RoHS, Tape and Ree", JLCPCB Part #=C22775, Manufacturer="Vishay Semiconductor", ComponentLink1Description="Manufacturer URL", ComponentLink1URL=http://www.vishay.com/, ComponentLink2Description=Datasheet, ComponentLink2URL=http://www.vishay.com/docs/20035/dcrcwe3.pdf, DatasheetVersion=06/2012, Mounting Technology="Surface Mount", PackageDescription="2-Pin Surface Mount Device, Body 1.575 x 0.85 mm", PackageReference=0603
R2: library part CMP-02407-007815-1, "RES Thick Film, 100kΩ, 1%, 0.33W, 100ppm/°C, 0603", Case Code (Imperial)=0603, Case Code (Metric)=1608, JLCPCB Part #=C25803, Manufacturer=Uniroyal, Max Operating Temperature=155°C, Max Power Dissipation=250mW, Min Operating Temperature=-55°C, Package Quantity=10, Resistance=100kR, Temperature Coefficient=100ppm/°C, Tolerance=1%, Voltage Rating=75V, Case/Package=0603, Composition="Thick Film", Contact Plating=Tin, Depth=0.85mm, Features="Automotive AEC-Q200", Height=0.45mm, Lead Free="Lead Free", Length=1.6mm, Manufacturer Part Number=0603WAF1003T5E, Military Standard=Not, Number of Terminations=2, Packaging="Tape and Reel", Power Rating=250mW, Radiation Hardening=No, Termination=SMD/SMT, Voltage Rating (DC)=75V, Weight=7.1E-05oz, Width=0.8mm
R3 R4: library part CMP-2000-03167-1, JLCPCB Part #=C4190, Manufacturer="Vishay Dale", Part Number=CRCW06032K20FKEA
R5: library part CMP-03412-021215-2, "RES 976KΩ 1.00% 0.1W 0603", Case/Package=0603, JLCPCB Part #=C48922, Max Operating Temperature=155°C, Max Power Dissipation=100mW, Min Operating Temperature=-55°C, Resistor Type="Thick Film", Temperature Coefficient=100ppm/°C, Tolerance=1%, Features="Moisture Resistant", Height=0.022inch, Length=0.063inch, Number of Terminations=2, Packaging="Tape and Reel", Resistance=976kR, RoHS Compliant=Yes, Series=AC, Width=0.031inch
R6: library part CMP-1659-00023-2, "Chip Resistor, 562 KOhm, +/- 1%, 0.1 W, -55 to 155 degC, 0603 (1608 Metric), RoHS, Tape and Reel", Colour=Green, Current Rating="8 A", JLCPCB Part #=C185319, Package Quantity=50, Voltage Rating="160 V", ComponentLink1Description="Manufacturer URL", ComponentLink1URL=http://www.yageo.com/, ComponentLink2Description=Datasheet, ComponentLink2URL=http://www.yageo.com/documents/recent/PYu-RC_Group_51_RoHS_L_04.pdf, Contact Plating=Tin, DatasheetVersion="Rev. 4, 02/2016", Diameter="7.25 mm", Height="9.2 mm", Lead Pitch="0.15 inch", Length="7 mm", Mount="Through Hole", PackageDescription="2-Pin Surface Mount Device, Body 1.6 x 0.8 mm", PackageReference=0603, Packaging=Bulk, Pins=2, RoHSCompliant=true, Weight="4 oz"
START: library part CMP-2000-05160-2, "SWITCH TACTILE SPST-NO 0.05A 12V", Case/Package=SMD/SMT, Color=Black, Contact Resistance=100mR, Current Rating=50mA, JLCPCB Part #=C221880, Max Operating Temperature=60°C, Max Voltage Rating (DC)=12V, Min Operating Temperature=-20°C, Operating Force=160gf, Package Quantity=1, Actuator Length=0.85mm, Actuator Material=Nylon, Actuator Type=Standard, Contact Material=Silver, Contact Plating=Silver, Depth=9mm, Illumination Type=Non-Illuminated, Lead Free="Lead Free", Length=6mm, Max Current Rating=50mA, Mechanical Life=100000Cycles, Mount="Surface Mount", Orientation=Straight, Packaging="Tape and Reel", REACH SVHC="No SVHC", Switch Function=Off-Mom, Termination="Gull Wing", Throw Configuration=SPST, Voltage Rating (DC)=12V

## Free pads (board coordinates)
  round 1.524 hole 3.2 unplated: MH(4.394,25.629) MH(96.469,3.454) MH(96.825,47.65)

## Via types
v1: diameter 0.6, hole 0.3, L1 (SIGNAL) to L4 (SIGNAL), 39 vias
v2: diameter 0.5, hole 0.2, L1 (SIGNAL) to L4 (SIGNAL), 4 vias

## Nets (pads, with @x,y where several pads share a name; then routed paths per layer and width w, separated by ;. In a path a pad name is that pad's centre, name@x,y a point inside that pad or via, vN(x,y) a via of type N, cw(c..) or ccw(c..) an arc to the next point about the centre after c; other vN are vias at no path point)
+3.3V: BOOST.5 BUZZER.1 C2.2 C4.2 C5.1 D1.2 DISPLAY.2 IMU.8 IMU.13 R3.1 R4.1 R5.2 STM32.20 STM32.23 | length 182.3
  L1 (SIGNAL) w0.3: 3.634,37.25 3.65,37.266 IMU.8 ; IMU.13 6.425,38.725 7.075,38.725
  L1 (SIGNAL) w0.4: 3.319,36.919 3.634,37.234 3.634,37.25 ; 7.075,38.725 7.2,38.6
  L1 (SIGNAL) w0.5: v1(2.7,36.9) 2.719,36.919 3.319,36.919 ; C4.2 6.31,36.61 6.31,36.883 7.197,37.77 7.22,37.77 C2.2@7.85,38.4 ; 7.2,38.6 7.8,38.6 C2.2 ; v1(9.6,37.4) 9.6,38.4 ; STM32.20 53.38,44.4 ; v1(53.365,45.923) 53.38,45.909 53.38,44.4 ; R4.1 53.38,44.4 ; R3.1 58.35,45.775 58.395,45.82 v1(58.395,45.847) ; C5.1 68.8,14.9 68.8,11.9 ; BOOST.5 69.75,9.35 69.214,9.35 68.8,9.764 68.8,11.9 ; R5.2 74.2,11.3 74.05,11.45 74,11.45 73.55,11.9 68.8,11.9 ; D1.2 D1.2@86,10.46
  L1 (SIGNAL) w0.7: C2.2 9.6,38.4 17.7,38.4 23.475,44.175 24.055,44.175 27.99,40.24 STM32.20 49.822,39.638 49.822,39.608 56.563,32.867 84.562,32.867 91.303,26.127 91.303,26.097 STM32.23 92.4,20.965 ; C5.1 69,15.376 73.349,19.725 91.16,19.725 92.333,20.897 92.4,20.965 ; D1.2@86,10.46 86,10.6 86.525,11.125 86.665,11.125 92.575,17.035 93.481,17.035 BUZZER.1@93.731,17.286 ; BUZZER.1@93.673,18.172 93.673,19.692 92.4,20.965
  L4 (SIGNAL) w0.5: v1(2.7,36.9) 2.705,36.9 3.445,36.16 8.333,36.16 9.573,37.4 v1(9.6,37.4) ; v1(53.365,45.923) 58.291,45.923 58.368,45.847 v1(58.395,45.847)
GND: BATTERY.2 BOOST.2 C1.1 C2.1 C3.2 C4.1 C5.2 C6.2 DISPLAY.1 IMU.1 IMU.9 IMU.11 IMU.18 IMU.25 Q1.2 R2.1 R6.1 START.3 START.4 STM32.19 STM32.22 | length 46.8
  L1 (SIGNAL) w0.3: IMU.1 2.425,41.225 3.125,41.225 3.8,40.55 v2(3.85,40.55) ; C1.1 3.465,36.15 4.074,36.759 4.074,37.266 4.125,37.317 4.125,38 IMU.9 4.15,38.85 4.75,39.45 v2(4.95,39.45) 5.15,39.25 IMU.11 ; v1(3.8,4.2) 3.8,8.675 BATTERY.2 ; IMU.25@5,40.55 5.675,41.225 6.375,41.225 IMU.18 7.25,41.25 7.625,40.875 8.061,40.875 C3.2 ; v1(5.969,34.315) 6.026,34.373 6.026,35.29 6.2,35.464 C4.1 ; C4.1@6.2,35.54 6.41,35.75 6.7,35.75 7.85,36.9 C2.1 ; v1(19.3,44.5) 19.35,44.45 21.21,44.45 DISPLAY.1 ; v1(44.78,26.924) START.3@44.78,28.795 ; START.3 START.4 ; C6.2 cw(c66,8.048) 66.1,8.048 v1(66.1,6) ; C5.2 v1(73.1,15.1) ; BOOST.2 72.343,9.157 72.943,9.157 v1(74,8.1) ; v1(76.1,3.6) 76.137,3.637 77.963,3.637 R2.1 79.177,3.673 Q1.2 ; R6.1 76.543,10.257 78.043,10.257 v1(78.1,10.2) ; v1(94.894,22.758) 94.894,24.954 STM32.22
  other v1: 86.36,1.854 64.033,2.972 28.194,7.468 15.316,7.874 43.637,7.95 2.743,14.554 63.373,16.459 35.077,16.51 83.287,16.662 16.231,16.84 51.664,17.704 4.216,22.301 42.494,23.292 4.343,28.499 6.655,43.815 41.91,44.196 85.598,46.203 69.621,46.304 4.496,46.634
  other v2: 3.85,39.45 4.95,40.55
IMU_INT: IMU.12 STM32.15 | length 65.9
  L1 (SIGNAL) w0.3: v1(5.08,36.855) 5.625,37.4 5.625,38 IMU.12 ; v1(61.9,44.6) 61.9,40.26 STM32.15
  L4 (SIGNAL) w0.3: v1(5.08,36.855) 7.15,38.925 7.15,39.027 9.162,41.039 41.739,41.039 45.3,44.6 v1(61.9,44.6)
NetBOOST_1: BOOST.1 L1.1 | length 3.5
  L1 (SIGNAL) w0.5: L1.1 72,8.3 72.05,8.35 BOOST.1
NetBOOST_3: BATTERY.1 BOOST.3 BOOST.6 C6.1 L1.2 | length 18.2
  L1 (SIGNAL) w0.254: BATTERY.1 BATTERY.1@60.875,10
  L1 (SIGNAL) w0.5: BATTERY.1@60.875,10 C6.1 67.528,10 69.128,8.4 69.75,8.4 BOOST.6 ; L1.2 70.548,5.151 69.8,5.899 BOOST.6 ; BOOST.3 72.15,10.2 71.614,10.2 70.925,9.511 70.925,8.939 70.386,8.4 69.85,8.4 BOOST.6
NetBOOST_4: BOOST.4 R5.1 R6.2 | length 7.9
  L1 (SIGNAL) w0.5: BOOST.4 70.05,10.25 70.8,11 72.936,11 74.05,9.886 74.05,9.7 R5.1 74.2,9.5 74.35,9.35 74.4,9.35 74.75,9 R6.2
NetBUZZER_2: BUZZER.2 D1.1 Q1.3 | length 15
  L1 (SIGNAL) w0.5: Q1.3 84.6,4 86,5.4 D1.1 86.348,6.198 92.532,6.198 94.067,7.732 BUZZER.2@94.067,8.185 ; BUZZER.2@93.813,7.698 BUZZER.2@94.463,8.348
NetC1_2: C1.2 IMU.10 | length 2.7
  L1 (SIGNAL) w0.3: C1.2 4.445,36.578 4.464,36.597 4.464,37.104 4.625,37.266 4.625,38 IMU.10
NetC3_1: C3.1 IMU.20 | length 4.4
  L1 (SIGNAL) w0.3: IMU.20 5.175,42 5.175,42.482 5.363,42.67 7.755,42.67 8.561,41.864 C3.1
NetQ1_1: Q1.1 R1.2 R2.2 | length 7.6
  L1 (SIGNAL) w0.5: R2.2 78.012,4.938 79.788,4.938 Q1.1 79.8,6.563 81.7,8.463 R1.2
NetR1_1: R1.1 STM32.31 | length 20.7
  L1 (SIGNAL) w0.3: v1(72,21.4) 72,24.92 STM32.31 ; v1(79,9) 79.375,9 80.3,9.925 R1.1
  L4 (SIGNAL) w0.3: v1(72,21.4) 79,14.4 v1(79,9)
NetSTART_1: START.1 START.2 STM32.34 | length 37
  L1 (SIGNAL) w0.5: START.2 START.1 40.678,28.791 40.678,27.698 46.777,21.6 61.06,21.6 STM32.34
SCL: DISPLAY.3 IMU.23 R3.2 STM32.16 | length 67.6
  L1 (SIGNAL) w0.3: IMU.23 3.675,42 3.675,42.482 7.593,46.4 24.34,46.4 DISPLAY.3
  L1 (SIGNAL) w0.5: DISPLAY.3@26.27,44.5 30.67,48.9 56.247,48.9 59.45,45.697 59.45,44.65 R3.2 59.6,44.425 59.38,44.205 STM32.16
SDA: DISPLAY.4 IMU.24 R4.2 STM32.17 | length 69.7
  L1 (SIGNAL) w0.3: IMU.24 3.175,42 3.175,42.576 8.319,47.72 24.78,47.72 v1(26.2,46.3)
  L1 (SIGNAL) w0.5: v1(30.6,44.4) 30.573,44.4 30.473,44.5 28.81,44.5 32.21,47.9 55.5,47.9 56.8,46.6 R4.2 56.8,40.28 STM32.17
  L4 (SIGNAL) w0.5: v1(26.2,46.3) 28.7,46.3 v1(30.6,44.4)
pads on no net: IMU.2 IMU.3 IMU.4 IMU.5 IMU.6 IMU.7 IMU.14 IMU.15 IMU.16 IMU.17 IMU.19 IMU.21 IMU.22 STM32.1 STM32.2 STM32.3 STM32.4 STM32.5 STM32.6 STM32.7 STM32.8 STM32.9 STM32.10 STM32.11 STM32.12 STM32.13 STM32.14 STM32.18 STM32.21 STM32.24 STM32.25 STM32.26 STM32.27 STM32.28 STM32.29 STM32.30 STM32.32 STM32.33 STM32.35 STM32.36 STM32.37 STM32.38 STM32.39 STM32.40

## Polygon pours and split planes (outlines as drawn)
GND on L2 (GND) "GND_L02_P001" (solid, pour order 1): 4.54,2 cw(c4.54,4.54) 2,4.54 2,45.46 cw(c4.54,45.46) 4.54,48 95.46,48 cw(c95.46,45.46) 98,45.46 98,4.54 cw(c95.46,4.54) 95.46,2 94,2
GND on L3 (GND) "GND_L03_P002" (solid, pour order 2): 4.54,2 cw(c4.54,4.54) 2,4.54 2,45.46 cw(c4.54,45.46) 4.54,48 95.46,48 cw(c95.46,45.46) 98,45.46 98,4.54 cw(c95.46,4.54) 95.46,2 94,2

## Silkscreen, mask and mechanical layers (free items; w line width, h text height)
Top Overlay:
  text "Daniel Mehany" at 63.79,46.751 h1.52
  text "Punch Speed Calculator" at 63.79,44.051 h1.52

## Text inside footprints (layer, text, board x,y; h text height)
STM32: Top Overlay "RESET" at 85.597,28.297 h1.02 r180; Top Overlay "BOOT0" at 85.796,38.462 h1.02 r180; Top Overlay "PA13" at 58.11,35.033 h1.02 r180; Top Overlay "PA14" at 58.11,32.493 h1.02 r180; Top Overlay "3V3" at 51.76,37.573 h1.02 r180; Top Overlay "SWDIO" at 51.76,35.033 h0.8 r180; Top Overlay "SWCLK" at 51.76,32.493 h0.8 r180; Top Overlay "GND" at 51.76,29.953 h1.02 r180; Top Overlay "C13" at 61.158,28.556 h1.02 r180; Top Overlay "PWR" at 61.793,38.716 h1.02 r180